# EAGLE board Front Board v33 (EAGLE 9.7.0)
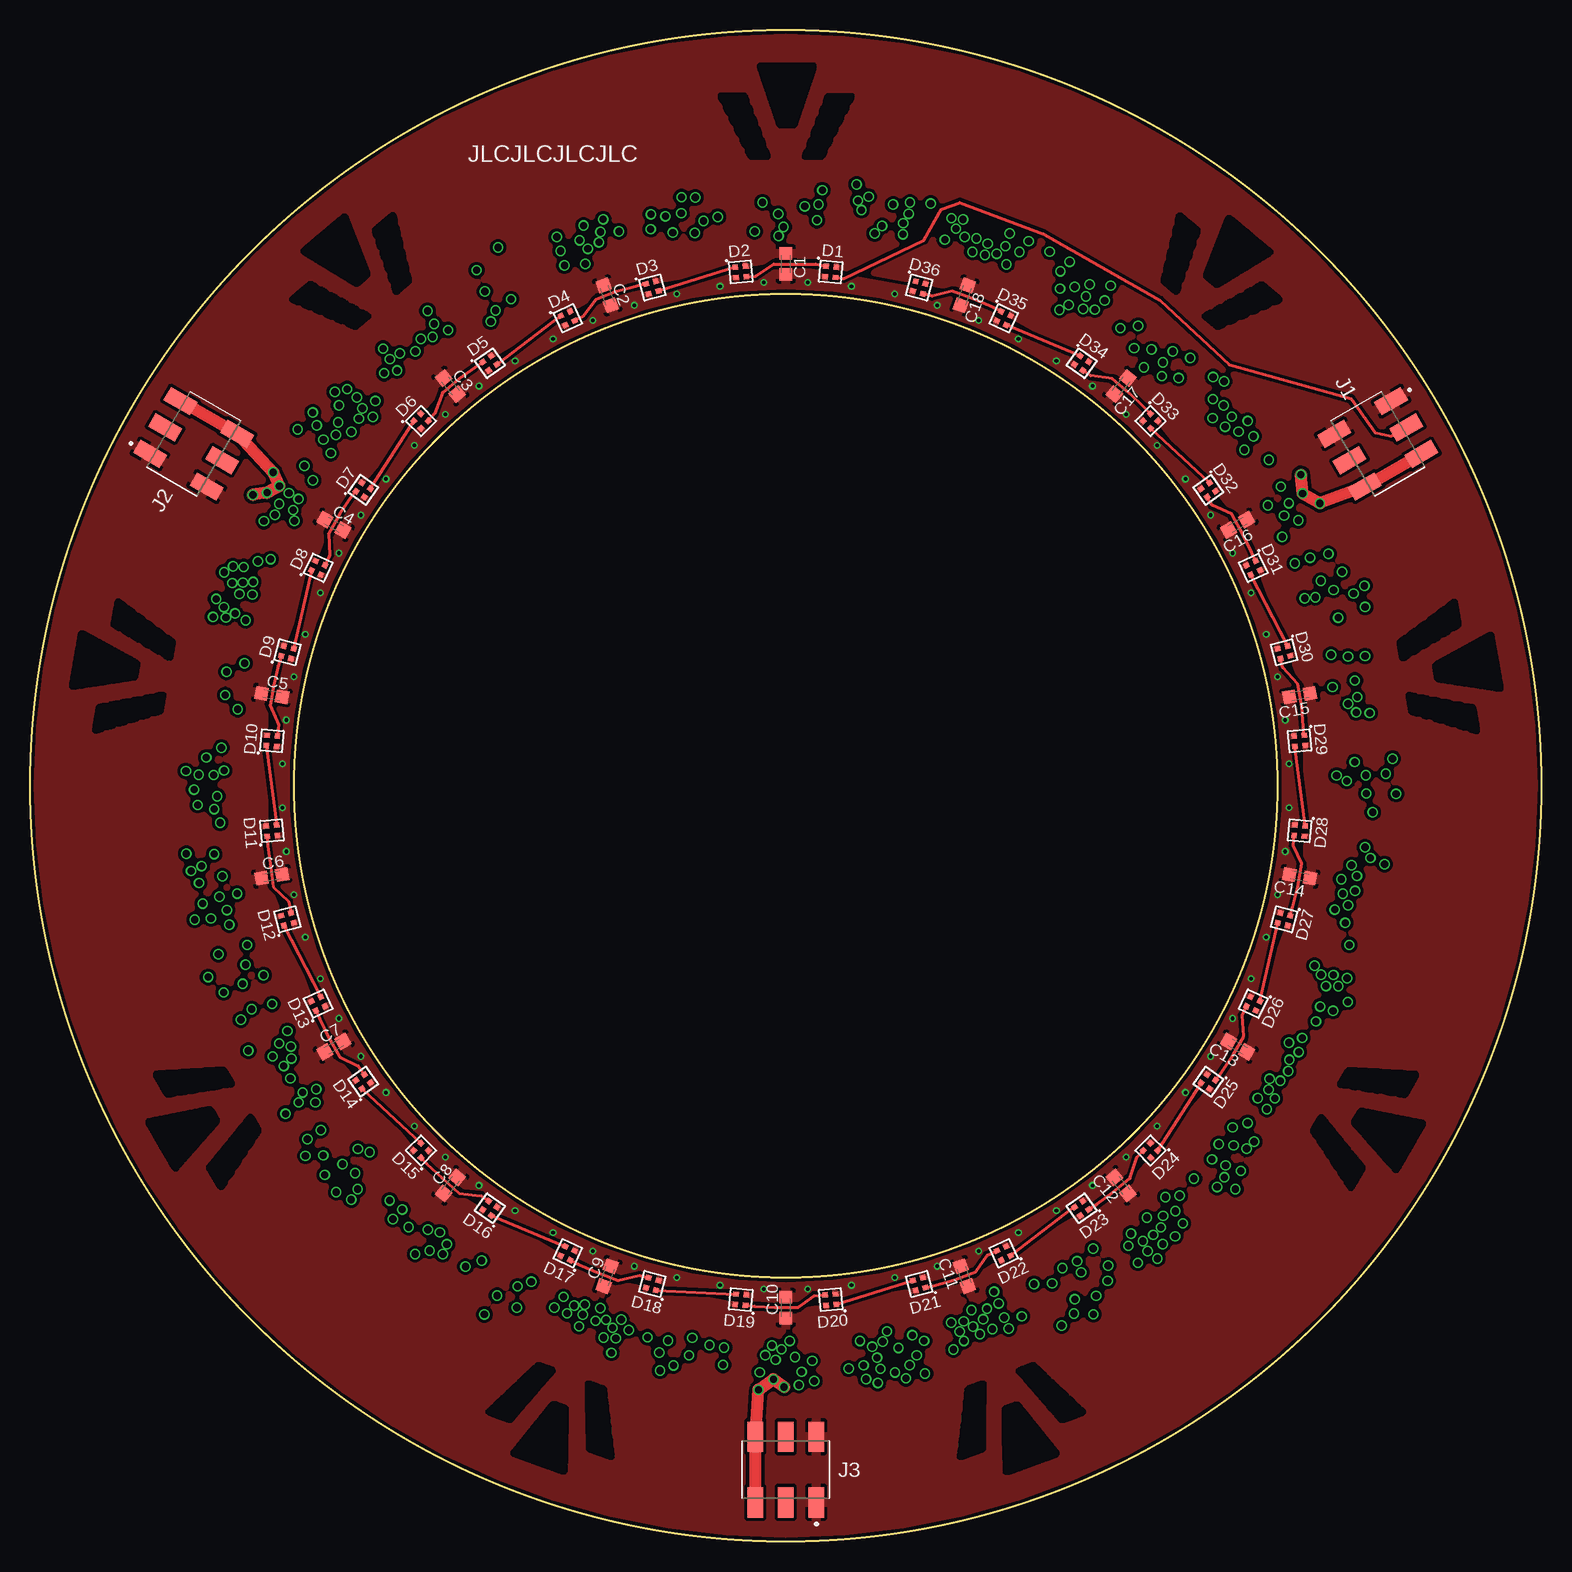
[diagram p0: board, top side]
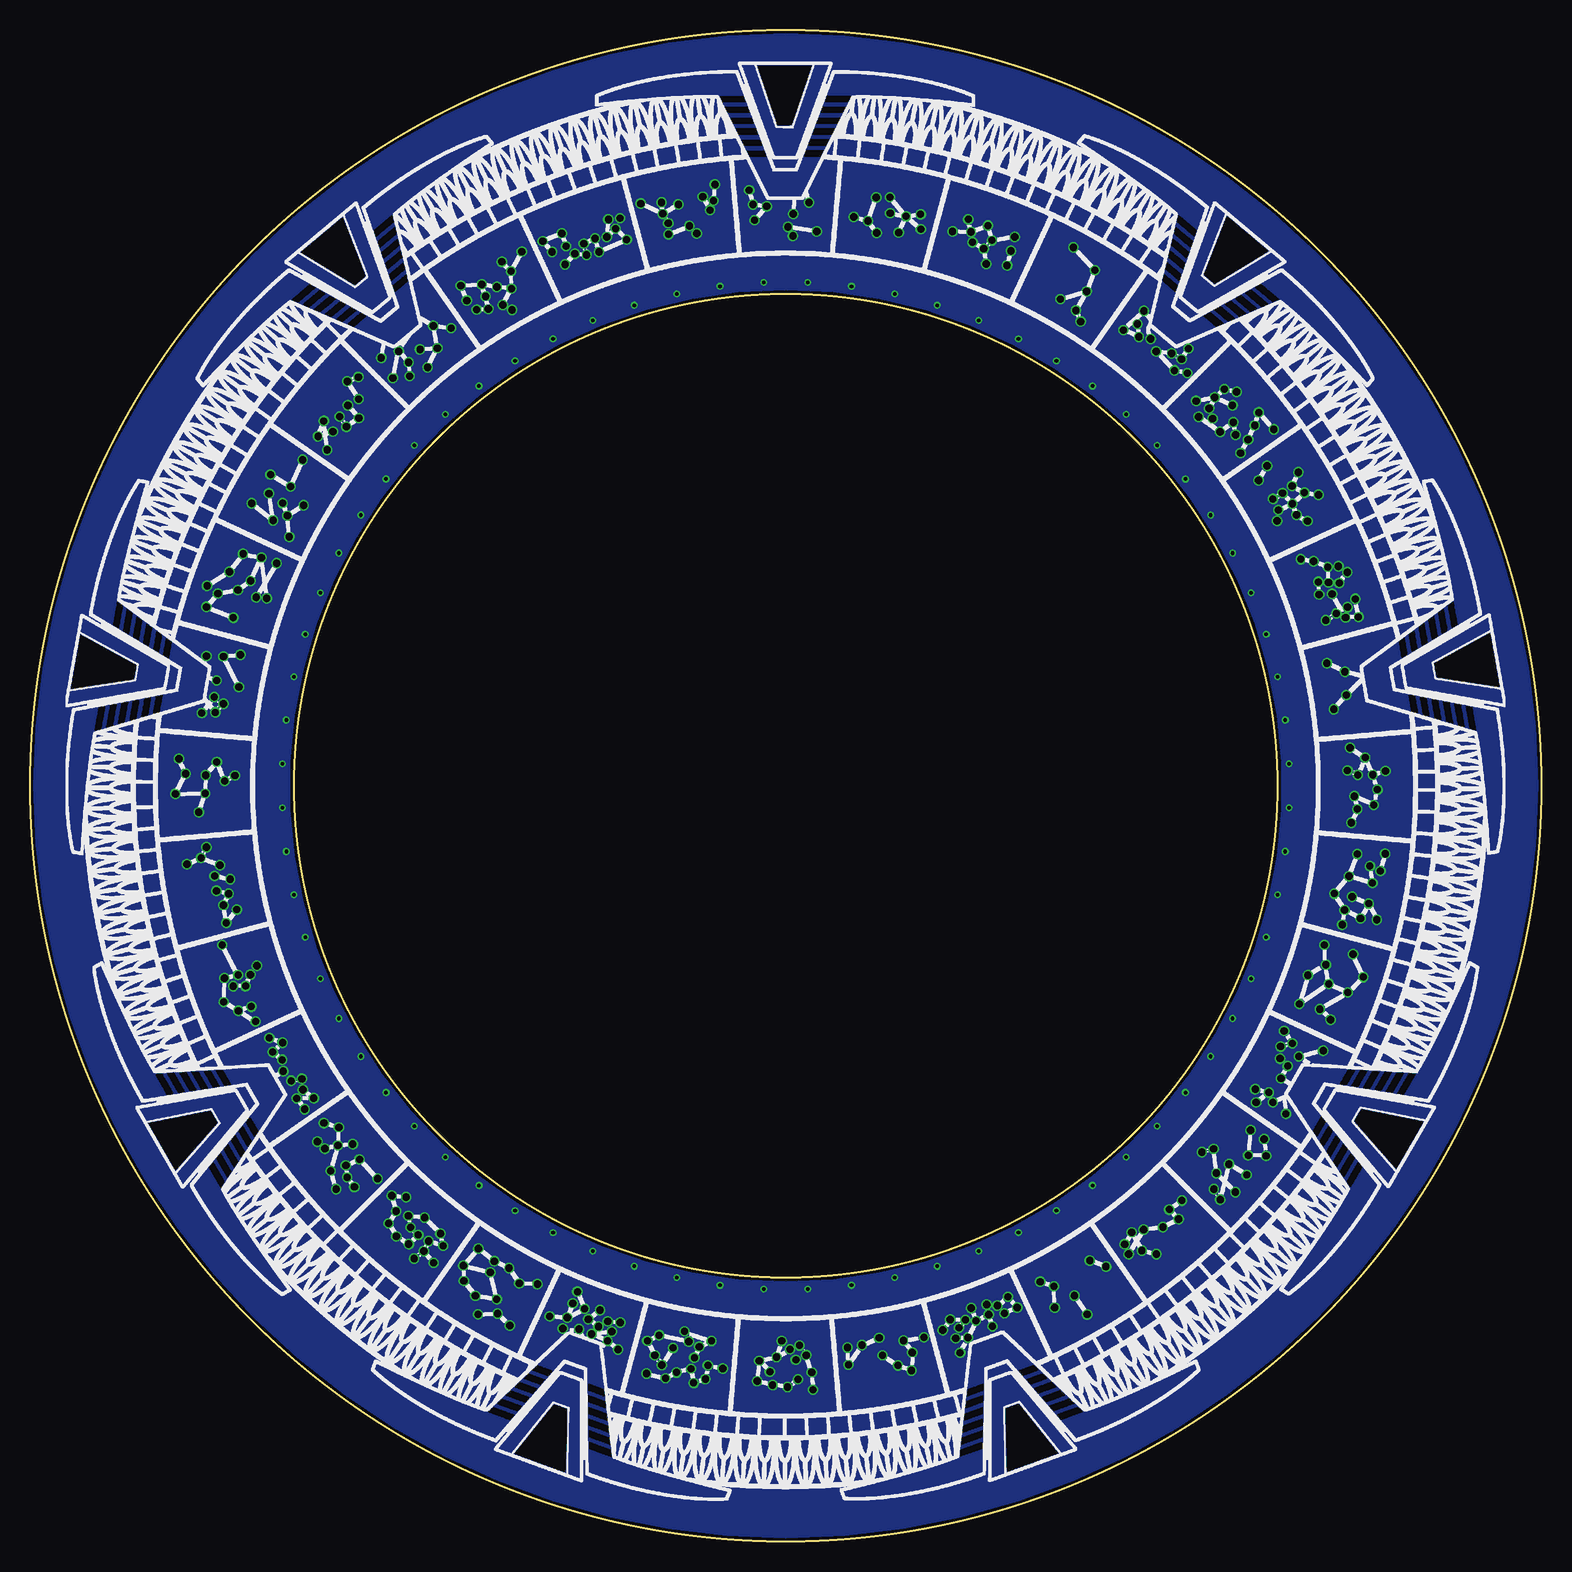
[diagram p1: board, bottom side, seen from below]

Size 126 x 126 mm. Coordinates in mm from the lower left corner, seen from the top.
Outline: circle at 63,63 radius 63
Outline: circle at 63,63 radius 41
Copper layers (1*16): Top / Bottom
Stack-up 2 Layer Stack: Top SilkScreen Epoxy Ink / Top SolderMask SR:Black 0.0254mm Dk 4 / Top Surface Finish Lead-Tin 0.02mm / Top CuFoil:007 0.035mm / Dielectric-1 User Defined 0.6392mm / Bottom CuFoil:007 0.035mm / Bottom Surface Finish Lead-Tin 0.02mm / Bottom SolderMask SR:Black 0.0254mm Dk 4 / Bottom SilkScreen Epoxy Ink
Design rules: minimum copper width 3.5mil, minimum drill size 0.2mm, copper clearance via to via 0.5mm, copper clearance wire_polygon to via 10mil, copper clearance wire_polygon to pad_smd 0.2mm, copper clearance wire_polygon to wire_polygon 5mil, copper clearance pad_smd to pad_smd 5mil, copper clearance pad_smd to via 5mil, copper clearance smd to pad (same net) 5mil, copper clearance smd to via (same net) 5mil, copper clearance smd to smd (same net) 5mil, dimension clearance 0.2mm, via restrict clearance 0mil, restrict clearance 0mil, drill distance 6mil, keepout clearance 0mil
RestrictTop: area 81.4,5.8 to 81.4,5.8; area 81.4,5.8 to 81.5,5.9; area 81.4,5.9 to 81.6,5.9; area 44.5,5.9 to 44.5,5.9; area 81.4,5.9 to 81.7,5.9; area 44.4,5.9 to 44.5,5.9; area 81.4,5.9 to 81.8,5.9; area 44.3,5.9 to 44.5,5.9; area 81.4,5.9 to 81.8,6; area 44.2,5.9 to 44.5,6; area 81.4,6 to 81.9,6; area 44.1,6 to 44.6,6; 6689 more areas
RestrictBottom: area 81.4,5.8 to 81.4,5.8; area 81.4,5.8 to 81.5,5.9; area 81.4,5.9 to 81.6,5.9; area 44.5,5.9 to 44.5,5.9; area 81.4,5.9 to 81.7,5.9; area 44.4,5.9 to 44.5,5.9; area 81.4,5.9 to 81.8,5.9; area 44.3,5.9 to 44.5,5.9; area 81.4,5.9 to 81.8,6; area 44.2,5.9 to 44.5,6; area 81.4,6 to 81.9,6; area 44.1,6 to 44.6,6; 6689 more areas

## Footprints (pad centres in the part's own frame; a part is rotated, then mirrored left to right if it is on the bottom)
C0603K = smd 1.05 x 1.08: 1 -0.875,0; 2 0.875,0
1010 = smd 0.45 x 0.45: DI 0.425,-0.425; DO -0.425,0.425; GND -0.425,-0.425; VDD 0.425,0.425
95278-101A06LF = smd 1.27 x 2.54: 1 -2.54,2.73; 2 -2.54,-2.73; 3 0,2.73; 4 0,-2.73; 5 2.54,2.73; 6 2.54,-2.73

## Placement (x,y rotation side)
C1  100n  [C0603K]  63,106.5 270 top
C2  100n  [C0603K]  48.12,103.88 290 top
C3  100n  [C0603K]  35.04,96.32 310 top
C4  100n  [C0603K]  25.33,84.75 330 top
C5  100n  [C0603K]  20.16,70.55 350 top
C6  100n  [C0603K]  20.16,55.45 10 top
C7  100n  [C0603K]  25.33,41.25 30 top
C8  100n  [C0603K]  35.04,29.68 50 top
C9  100n  [C0603K]  48.12,22.12 70 top
C10  100n  [C0603K]  63,19.5 90 top
C11  100n  [C0603K]  77.88,22.12 110 top
C12  100n  [C0603K]  90.96,29.68 130 top
C13  100n  [C0603K]  100.67,41.25 150 top
C14  100n  [C0603K]  105.84,55.45 170 top
C15  100n  [C0603K]  105.84,70.55 190 top
C16  100n  [C0603K]  100.67,84.75 210 top
C17  100n  [C0603K]  90.96,96.32 230 top
C18  100n  [C0603K]  77.88,103.88 250 top
D1  WS2812B  [1010]  66.75,105.84 355 top
D2  WS2812B  [1010]  59.25,105.84 5 top
D3  WS2812B  [1010]  51.87,104.53 15 top
D4  WS2812B  [1010]  44.83,101.97 25 top
D5  WS2812B  [1010]  38.34,98.22 35 top
D6  WS2812B  [1010]  32.59,93.41 45 top
D7  WS2812B  [1010]  27.78,87.66 55 top
D8  WS2812B  [1010]  24.03,81.17 65 top
D9  WS2812B  [1010]  21.47,74.13 75 top
D10  WS2812B  [1010]  20.16,66.75 85 top
D11  WS2812B  [1010]  20.16,59.25 95 top
D12  WS2812B  [1010]  21.47,51.87 105 top
D13  WS2812B  [1010]  24.03,44.83 115 top
D14  WS2812B  [1010]  27.78,38.34 125 top
D15  WS2812B  [1010]  32.59,32.59 135 top
D16  WS2812B  [1010]  38.34,27.78 145 top
D17  WS2812B  [1010]  44.83,24.03 155 top
D18  WS2812B  [1010]  51.87,21.47 165 top
D19  WS2812B  [1010]  59.25,20.16 175 top
D20  WS2812B  [1010]  66.75,20.16 185 top
D21  WS2812B  [1010]  74.13,21.47 195 top
D22  WS2812B  [1010]  81.17,24.03 205 top
D23  WS2812B  [1010]  87.66,27.78 215 top
D24  WS2812B  [1010]  93.41,32.59 225 top
D25  WS2812B  [1010]  98.22,38.34 235 top
D26  WS2812B  [1010]  101.97,44.83 245 top
D27  WS2812B  [1010]  104.53,51.87 255 top
D28  WS2812B  [1010]  105.84,59.25 265 top
D29  WS2812B  [1010]  105.84,66.75 275 top
D30  WS2812B  [1010]  104.53,74.13 285 top
D31  WS2812B  [1010]  101.97,81.17 295 top
D32  WS2812B  [1010]  98.22,87.66 305 top
D33  WS2812B  [1010]  93.41,93.41 315 top
D34  WS2812B  [1010]  87.66,98.22 325 top
D35  WS2812B  [1010]  81.17,101.97 335 top
D36  WS2812B  [1010]  74.13,104.53 345 top
J1  95278-101A06LF  [95278-101A06LF]  112.36,91.5 300 top
J2  95278-101A06LF  [95278-101A06LF]  13.64,91.5 60 top
J3  95278-101A06LF  [95278-101A06LF]  63,6 180 top

## Library data of the parts
C1-C18 = rcl; SPICEPREFIX: C
D1-D36 = SnapEDA Library
J1-J3 = Connectors; CREATED_BY: PCBLayout.com; DIGIKEY_PART_NUMBER: 609-3487-1-ND; MANUFACTURER: Amphenol ICC (FCI); MPN: 95278-101A06LF

## Nets
+5V: C1.1 C2.1 C3.1 C4.1 C5.1 C6.1 C7.1 C8.1 C9.1 C10.1 C11.1 C12.1 C13.1 C14.1 C15.1 C16.1 C17.1 C18.1 D1.VDD D2.VDD D3.VDD D4.VDD D5.VDD D6.VDD D7.VDD D8.VDD D9.VDD D10.VDD D11.VDD D12.VDD D13.VDD D14.VDD D15.VDD D16.VDD D17.VDD D18.VDD D19.VDD D20.VDD D21.VDD D22.VDD D23.VDD D24.VDD D25.VDD D26.VDD D27.VDD D28.VDD D29.VDD D30.VDD D31.VDD D32.VDD D33.VDD D34.VDD D35.VDD D36.VDD J1.1 J1.2 J2.1 J2.2 J3.1 J3.2
GND: C1.2 C2.2 C3.2 C4.2 C5.2 C6.2 C7.2 C8.2 C9.2 C10.2 C11.2 C12.2 C13.2 C14.2 C15.2 C16.2 C17.2 C18.2 D1.GND D2.GND D3.GND D4.GND D5.GND D6.GND D7.GND D8.GND D9.GND D10.GND D11.GND D12.GND D13.GND D14.GND D15.GND D16.GND D17.GND D18.GND D19.GND D20.GND D21.GND D22.GND D23.GND D24.GND D25.GND D26.GND D27.GND D28.GND D29.GND D30.GND D31.GND D32.GND D33.GND D34.GND D35.GND D36.GND J1.5 J1.6 J2.5 J2.6 J3.5 J3.6
N$1: D1.DO D2.DI
N$2: D2.DO D3.DI
N$3: D3.DO D4.DI
N$4: D4.DO D5.DI
N$5: D5.DO D6.DI
N$6: D6.DO D7.DI
N$7: D7.DO D8.DI
N$8: D8.DO D9.DI
N$9: D9.DO D10.DI
N$10: D10.DO D11.DI
N$11: D11.DO D12.DI
N$12: D12.DO D13.DI
N$13: D13.DO D14.DI
N$14: D14.DO D15.DI
N$15: D15.DO D16.DI
N$16: D16.DO D17.DI
N$17: D17.DO D18.DI
N$18: D18.DO D19.DI
N$19: D19.DO D20.DI
N$20: D20.DO D21.DI
N$21: D21.DO D22.DI
N$22: D22.DO D23.DI
N$23: D23.DO D24.DI
N$24: D24.DO D25.DI
N$25: D25.DO D26.DI
N$26: D26.DO D27.DI
N$27: D27.DO D28.DI
N$28: D28.DO D29.DI
N$29: D29.DO D30.DI
N$30: D30.DO D31.DI
N$31: D31.DO D32.DI
N$32: D32.DO D33.DI
N$33: D1.DI J1.3
N$34: D33.DO D34.DI
N$35: D34.DO D35.DI
N$36: D35.DO D36.DI
N$37: D36.DO

## Tracks (layer width: path | path; a pad name or v marks a point on that pad's centre or on a via)
+5V
  pour Top (isolate 0.254, rank 4): 144,130.5 144,-5 -17,-5 -17,132
GND  (via drill 0.3, 0.6)
  Top 1.016: J1.5 J1.6 v107.52,86.55 v106.09,87.36 v105.95,88.93 | J3.5 J3.6 v60.73,12.65 v61.97,13.53 v62.85,12.88 | J2.5 J2.6 v20.27,89.12 v20.78,87.99 v19.76,87.43 v18.58,87.25
  other vias: 62.41,108.84 62.82,109.58 60.41,109.21 61.06,111.63 62.37,110.66 64.59,111.3 65.73,111.46 65.61,110.14 66.05,112.65 68.91,113.12 69.02,111.77 69.31,110.99 69.92,112.1 71.95,111.45 73.35,111.62 75.08,111.53 73.26,110.68 72.79,109.9 72.77,108.97 71.03,109.66 70.41,109.03 77.18,109.44 77.78,110.21 76.82,110.32 76.26,108.52 77.91,108.75 78.56,107.5 78.9,108.62 79.84,108.19 79.6,107.25 80.58,107.35 81.39,106.46 81.31,107.97 82.47,107.5 81.66,109.04 83.24,108.39 85,107.52 86.67,106.68 85.9,105.88 85.87,104.44 87.09,104.59 88.33,104.79 90.08,104.68 89.59,103.45 88.02,103.79 86.58,103.08 85.81,102.67 87.8,102.75 88.76,102.69 90.89,101.15 92.37,101.34 92.05,99.48 93.49,99.38 92.86,97.87 95.26,99.21 94.43,98.29 94.35,97.15 95.75,96.99 96.72,98.66 98.62,97.07 99.54,96.7 98.61,95.23 99.5,94.71 98.58,93.64 100.19,93.78 99.62,92.93 101.51,93.4 100.75,92.52 101.99,92.13 101.23,90.99 103.27,90.16 104.27,87.94 104.93,86.55 103.18,86.37 104.54,85.52 104.39,83.75 105.72,85.12 105.44,81.55 106.71,82.01 108.24,82.33 109.38,80.83 111.24,79.67 107.6,80.09 106.26,78.63 107.15,78.71 108.67,79.31 110.34,79.02 111.3,77.9 109.05,77.01 108.45,73.91 109.88,73.77 111.29,73.81 110.44,71.78 108.58,71.23 110.65,70.39 109.88,69.84 110.55,69.12 111.68,69.07 108.91,63.85 109.77,63.4 110.43,64.98 111.36,63.88 111.4,62.36 113.58,65.26 113.02,64.01 113.87,62.32 111.93,60.79 111.29,57.87 111.74,56.98 112.91,56.46 110.16,56.37 110.61,55.47 109.31,55.22 110.46,54.24 109.44,54 109.87,53.04 108.76,52.68 109.64,51.57 109.98,49.74 107.08,47.99 107.63,47.24 108.03,46.3 109.07,46.28 108.66,47.23 109.8,46.96 109.85,44.98 108.62,44.24 107.55,44.59 107.2,43.35 106.05,41.98 104.95,41.59 105.76,40.8 104.98,40.16 104.88,39.21 104.23,38.41 103.33,38.57 103.25,37.66 103.77,36.93 103.11,36.05 102.34,36.97 101.49,34.89 100.26,34.53 102.05,33.34 101.42,32.74 100.33,33.01 99.09,33.12 100.93,30.9 100.49,29.38 98.95,29.55 99.56,30.36 99.67,31.35 98.53,31.85 97.03,30.25 94.65,28.72 95.84,28.83 95.48,27.54 96.1,26.53 95.45,25.44 94.43,24.79 93.64,25.56 94.28,26.18 94.47,27.15 93.1,27 91.78,25.66 91.57,24.65 92.77,25.04 93.17,24.2 93.98,23.59 92.36,23.24 83.7,21.46 85.2,21.52 86.06,22.79 87.29,23.37 88.62,24.42 89.87,23 87.63,22.43 89.83,21.73 88.87,20.48 87.09,20.2 88.64,18.93 87.01,18.99 86,18 81.59,17.75 81.21,18.67 82.68,18.78 80.75,19.84 80.36,20.82 79.77,19.41 80.23,17.71 79.46,18.53 78.47,19.29 76.8,18.25 77.83,18.35 78.61,17.92 79.19,17.29 77.5,17.5 77.86,16.72 76.98,16 73.55,17.2 74.53,16.73 73.92,15.51 74.61,14 73.03,13.6 72.1,14.1 73.33,14.7 72.39,16.14 71.08,16.67 71.43,17.52 69.19,16.72 70.2,16.24 70.61,15.32 70.9,14.4 68.25,14.41 69.49,14.69 69.7,13.55 70.68,13.22 60.83,14.1 61.3,15.53 61.86,16.34 62.16,15.15 62.65,16.01 63.33,16.72 63.77,15.37 65.2,15.06 64.32,14.15 65.38,13.37 64.09,13.04 51.48,17.03 53.19,16.75 52.46,15.75 52.52,14.24 53.64,14.68 54.94,15.52 55.21,16.97 56.65,16.37 57.86,16.16 57.78,14.72 48.47,15.73 47.81,17 48.57,17.81 48.83,16.94 49.91,17.62 49.29,18.5 48.02,18.49 47.14,18.39 45.77,17.94 46.09,18.91 47.54,19.45 46.26,19.74 44.77,19.01 45.36,19.66 44.47,20.4 43.71,19.51 37.88,18.93 38.93,20.5 40.58,19.5 40.65,21.27 41.78,21.66 37.65,23.42 36.3,22.92 32.1,23.96 33.31,24.25 34.41,23.95 34.75,24.78 34.17,25.77 33.17,26 31.56,26.22 30.25,26.87 31.03,27.68 29.99,28.43 26.78,28.5 27.31,29.37 28.31,32.46 27.33,32.73 27.11,30.71 25.53,29.13 26.05,31.46 24.57,30.57 24.45,32.19 22.96,32.15 23.13,33.54 24.25,34.3 21.3,35.66 22.4,36.61 22.73,37.43 23.86,37.71 23.79,36.6 21.7,38.61 21.15,39.64 21.79,40.26 21.76,41.26 20.77,41.53 21.47,42.56 18.2,40.91 20.23,40.43 17.58,43.5 18.48,44.38 20.19,44.81 19.47,47.22 17.72,46.49 16.15,45.77 14.85,47.05 15.71,48.96 17.97,48.08 18.11,49.73 16.62,51.42 16.42,52.64 17.27,54.01 15.79,53.75 14.39,53.18 15.09,51.94 13.73,51.83 14.1,54.9 16.05,55.46 14.3,56.3 15.36,57.3 13.43,55.9 13.03,57.33 15.86,59.91 15.35,61.05 15.61,62.13 13.98,61.4 13.68,62.68 14.07,63.91 12.99,64.23 15.31,63.9 16.18,64.27 14.7,65.36 15.96,66.17 17.31,69.38 16.27,70.56 16.38,72.5 17.89,73.21 17.98,76.8 17.09,77.36 16.34,77.02 15.26,77.07 16.16,77.89 15.52,78.57 17.46,78.99 18.54,78.94 18.61,79.99 17.75,79.94 16.86,79.89 16.18,80.8 16.93,81.3 17.81,81.23 19,81.71 20.06,81.88 19.5,85.06 20.41,85.58 22.04,85.09 21.94,85.98 22.39,86.9 21.58,87.39 20.77,86.5 22.87,89.66 23.59,88.45 25.08,90.73 24.47,91.85 23.91,93.04 23.57,94.12 22.31,92.71 25.51,92.26 25.69,93.29 26.79,92.5 27.41,93.6 28.59,93.76 27.7,94.46 28.8,95.07 27.24,95.38 25.76,94.7 26.43,96.07 25.41,95.83 29.52,97.39 30.6,97.61 30,98.56 29.44,99.44 30.84,99.04 32.13,99.22 32.59,100.25 33.56,100.42 33.68,101.5 33.14,102.59 34.85,100.98 38.41,101.7 38.81,102.63 37.92,104.21 37.23,105.97 40.1,103.56 39.02,107.87 43.91,108.76 44.23,107.59 44.55,106.37 46.29,106.51 46.5,107.76 45.81,108.47 46.15,109.7 47.43,108.3 47.55,109.17 47.78,110.22 49.09,109.21 51.76,110.64 52.97,110.47 51.74,109.39 53.58,109.11 54.3,110.72 54.31,112.07 55.46,112.03 57.34,110.42 56.15,110.09 55.42,109.08 104.96,64.83 104,72.09 101.8,79.07 98.42,85.57 93.97,91.37 88.57,96.32 82.39,100.25 75.63,103.06 68.48,104.64 61.17,104.96 53.91,104 46.93,101.8 40.43,98.42 34.63,93.97 29.68,88.57 25.75,82.39 22.94,75.63 21.36,68.48 21.04,61.17 22,53.91 24.2,46.93 27.58,40.43 32.03,34.63 37.43,29.68 43.61,25.75 50.37,22.94 57.52,21.36 64.83,21.04 72.09,22 79.07,24.2 85.57,27.58 91.37,32.03 96.32,37.43 100.25,43.61 103.06,50.37 104.64,57.52 104.96,61.17 104.64,68.48 103.06,75.63 100.25,82.39 96.32,88.57 91.37,93.97 85.57,98.42 79.07,101.8 72.09,104 64.83,104.96 57.52,104.64 50.37,103.06 43.61,100.25 37.43,96.32 32.03,91.37 27.58,85.57 24.2,79.07 22,72.09 21.04,64.83 21.36,57.52 22.94,50.37 25.75,43.61 29.68,37.43 34.63,32.03 40.43,27.58 46.93,24.2 53.91,22 61.17,21.04 68.48,21.36 75.63,22.94 82.39,25.75 88.57,29.68 93.97,34.63 98.42,40.43 101.8,46.93 104,53.91
  pour Bottom (no thermals): -4.5,126.5 127.5,126.5 127.5,-5 -5.5,-5
  pour Top (isolate 0.254, rank 3): 63,106.5 66.76,105.83 74.13,104.54 77.87,103.87 81.18,101.97 87.66,98.22 90.96,96.32 93.41,93.41 98.22,87.67 100.67,84.76 101.97,81.17 104.54,74.13 105.84,70.55 105.83,66.75 105.84,59.25 105.84,55.45 104.54,51.86 101.98,44.83 100.67,41.25 98.21,38.33 93.41,32.58 90.96,29.66 87.66,27.78 81.17,24.02 77.88,22.12 74.13,21.47 66.75,20.15 62.98,19.5 59.24,20.16 51.87,21.47 48.12,22.11 44.82,24.01 38.33,27.77 35.02,29.69 32.6,32.6 27.77,38.35 25.33,41.24 24.03,44.82 21.46,51.87 20.16,55.46 20.16,59.25 20.17,66.75 20.16,70.56 21.47,74.13 24.02,81.17 25.32,84.75 27.78,87.65 32.59,93.41 35.04,96.33 38.34,98.22 44.81,101.98 48.13,103.87 51.87,104.53 59.26,105.82 62.92,106.5
N$1
  Top 0.254: D2.DI 60.5,105.5 62,106.5 64,106.5 65.5,106.5 D1.DO
N$2
  Top 0.254: D2.DO D3.DI
N$3
  Top 0.254: D3.DO 50,104.5 48.86,104.18 47.18,103.51 46.11,102.12 D4.DI
N$4
  Top 0.254: D5.DI D4.DO
N$5
  Top 0.254: D5.DO 37.05,97.85 35.77,96.94 34.38,95.77 33.71,94 D6.DI
N$6
  Top 0.254: D6.DO D7.DI
N$7
  Top 0.254: D7.DO 26.68,86.92 25.82,85.62 24.88,84.01 24.97,82.22 D8.DI
N$8
  Top 0.254: D8.DO D9.DI
N$9
  Top 0.254: D9.DO 20.69,73 20.3,71.34 20.01,69.7 20.71,68.07 D10.DI
N$10
  Top 0.254: D10.DO D11.DI
N$11
  Top 0.254: D11.DO 19.83,57.98 20.05,56.25 20.29,54.57 21.56,53.34 D12.DI
N$12
  Top 0.254: D12.DO D13.DI
N$13
  Top 0.254: D13.DO 24.13,43.57 24.87,42.05 25.81,40.41 27.36,39.66 D14.DI
N$14
  Top 0.254: D14.DO D15.DI
N$15
  Top 0.254: D15.DO 33.07,31.49 34.34,30.3 35.75,29.03 37.62,28.83 D16.DI
N$16
  Top 0.254: D16.DO D17.DI
N$17
  Top 0.254: D17.DO 45.72,23.12 47.2,22.46 49.02,21.77 50.82,22.18 D18.DI
N$18
  Top 0.254: D18.DO D19.DI
N$19
  Top 0.254: D19.DO 60.41,19.62 62.09,19.51 64.06,19.51 65.38,20.49 D20.DI
N$20
  Top 0.254: D20.DO D21.DI
N$21
  Top 0.254: D21.DO 75.25,21.31 77.06,21.81 78.83,22.48 79.78,23.86 D22.DI
N$22
  Top 0.254: D22.DO D23.DI
N$23
  Top 0.254: D23.DO 88.97,28.16 90.23,29.08 91.7,30.27 92.25,32.03 D24.DI
N$24
  Top 0.254: D24.DO D25.DI
N$25
  Top 0.254: D25.DO 99.27,39.05 100.32,40.62 101.18,42.12 101.05,43.87 D26.DI
N$26
  Top 0.254: D26.DO D27.DI
N$27
  Top 0.254: D27.DO 105.27,52.95 105.69,54.59 106,56.5 105.3,58 D28.DI
N$28
  Top 0.254: D28.DO D29.DI
N$29
  Top 0.254: D29.DO 106.15,67.94 106.02,69.61 105.67,71.47 104.44,72.84 D30.DI
N$30
  Top 0.254: D30.DO D31.DI
N$31
  Top 0.254: D31.DO 101.82,82.52 101.16,83.89 100.17,85.64 98.53,86.38 D32.DI
N$32
  Top 0.254: D33.DI D32.DO
N$33
  Top 0.254: D1.DI 67.83,105.29 74.5,108.5 75.96,111.06 77.51,111.62 84.5,109 94.19,103.47 99.98,98.09 110.13,95.26 112.14,92.44 113.44,92.14 J1.3
N$34
  Top 0.254: D33.DO 92.82,94.59 91.68,95.7 90.22,96.94 88.42,97.17 D34.DI
N$35
  Top 0.254: D34.DO D35.DI
N$36
  Top 0.254: D35.DO 80.24,102.89 78.76,103.54 76.87,104.24 75.19,103.81 D36.DI

## Text on the board
SilkscreenTop: JLCJLCJLCJLC